# EAGLE board Memory Display (EAGLE 7.7.0)
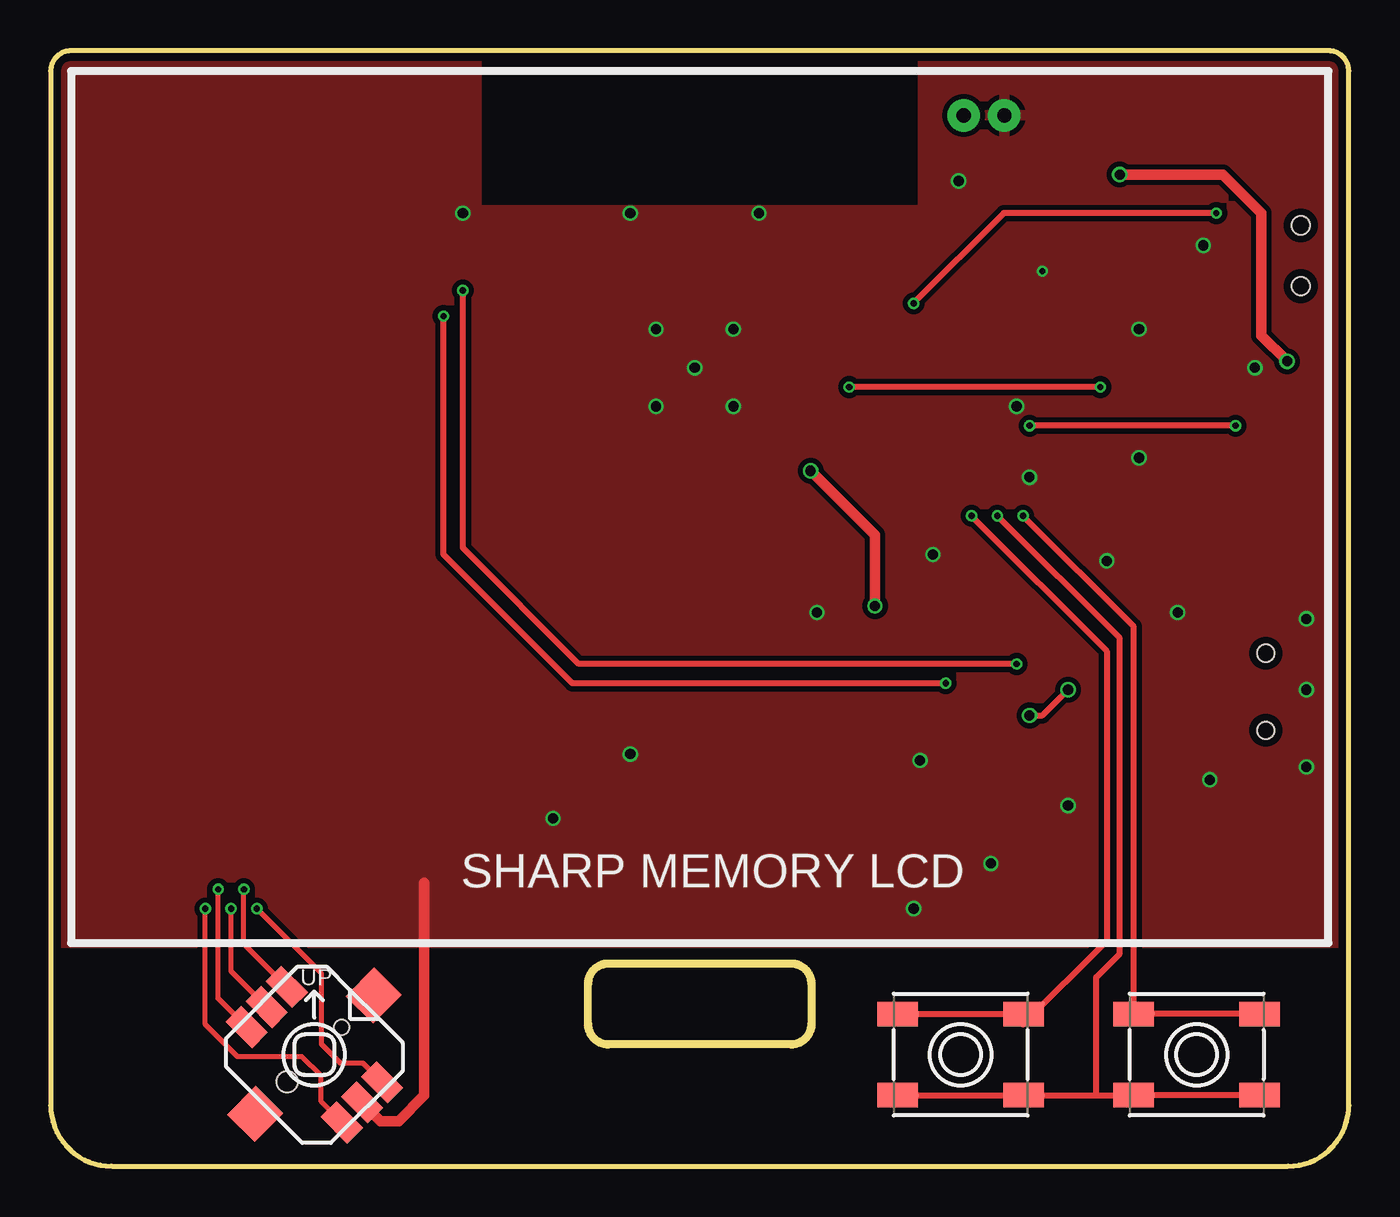
[diagram p0: board, top side]
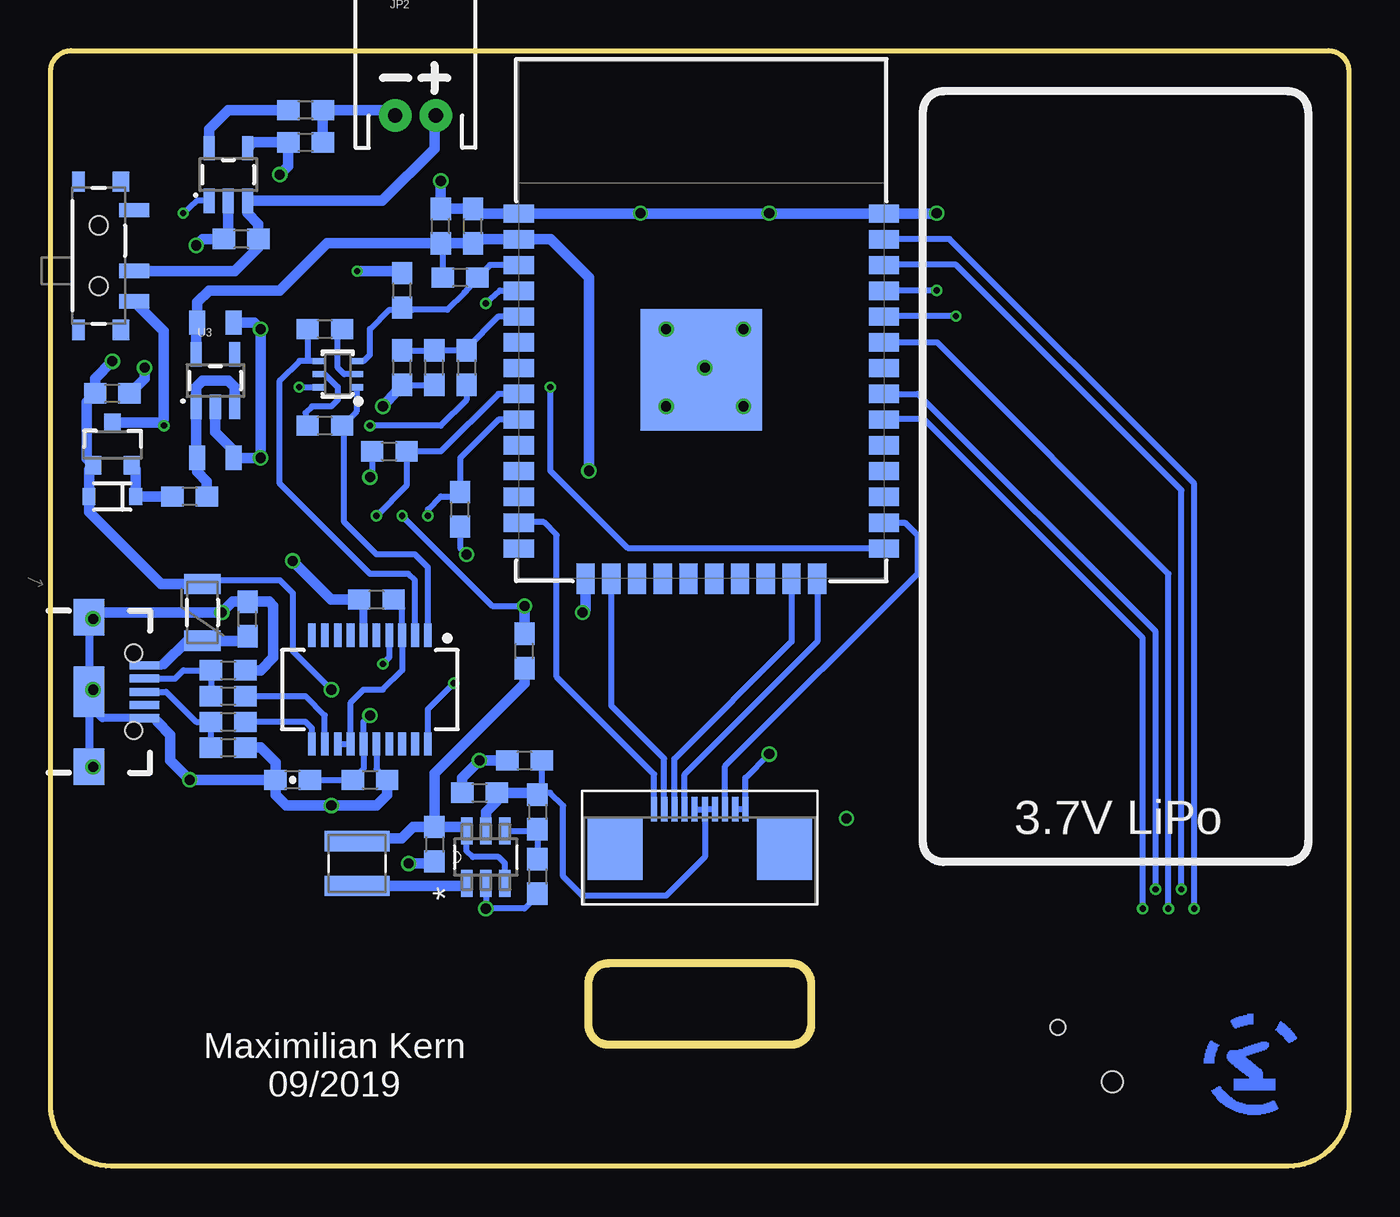
[diagram p1: board, bottom side, seen from below]

Size 64 x 55 mm. Coordinates in mm from the lower left corner, seen from the top.
Outline: 63,55 1,55 arc90 0,54 0,3 arc90 3,0 61,0 arc90 64,3 64,54 arc90 63,55
Copper layers (1*16): Top 0.035559375mm / dielectric 1.6mm / Bottom 0.035559375mm
Design rules "oshpark-2layer *": minimum track width 6mil, minimum drill 10mil, track to track 6mil, track to pad 6mil, pad to pad 6mil, via to via 6mil, smd to smd 6mil, copper to edge 15mil, drill to drill 6mil, minimum pad ring 5mil, minimum via ring 5mil, stop-mask expansion 2.5mil, vias tented up to drill 43mil, thermal gap 10mil
bKeepout: area 2,15 to 21,53
Milling: 8 lines

## Footprints (pad centres in the part's own frame; a part is rotated, then mirrored left to right if it is on the bottom)
0603 = smd 1.1 x 1: 1 -0.85,0; 2 0.85,0
0805 = smd 0.8 x 1.2: 1 -0.9,0; 2 0.9,0
0603-CAP = smd 1.1 x 1: 1 -0.85,0; 2 0.85,0
SOD-323 = smd 0.63 x 0.83: A 1.15,0; C -1.15,0
PTC-1206 = smd 1 x 1.8: 1 -1.4,0; 2 1.4,0
JST-2-PTH = drill 0.7 pad 1.6: 1 -1,0; 2 1,0
USB-B-MICRO-SMD_V03 = smd 1.45 x 0.4: D+ 2.725,0; D- 2.725,0.65; GND 2.725,-1.3; ID 2.725,-0.65; VBUS 2.725,1.3 | smd 1.5 x 1.8: SHIELD1 0,3.685; SHIELD2 0,-3.685 | smd 1.5 x 2.5: SHIELD3 0,0 | hole 0.85: 2.2,1.9; 2.2,-1.9
68711014522 = smd 0.3 x 1.2: 1 -2.25,0.6; 2 -1.75,0.6; 3 -1.25,0.6; 4 -0.75,0.6; 5 -0.25,0.6; 6 0.25,0.6; 7 0.75,0.6; 8 1.25,0.6; 9 1.75,0.6; 10 2.25,0.6 | smd 2.7 x 3: Z1 -4.18,-1.38; Z2 4.18,-1.38
WE-TPC_2811/2813_OLD = smd 1 x 3.2: 1 -1.1,0; 2 1.1,0
SOT23-3 = smd 0.8 x 0.9: 1 -0.95,-1; 2 0.95,-1; 3 0,1.1
SC70-6 = smd 0.3 x 0.66: 1 -0.65,-0.92; 2 0,-0.92; 3 0.65,-0.92; 4 0.65,0.92; 5 0,0.92; 6 -0.65,0.92
JOYSTICK_MINI = smd 1.85 x 1.1: A -3.325,1.4; B 3.325,1.4; C -3.325,-1.4; CTR -3.325,0; D 3.325,-1.4; GND 3.325,0 | smd 1.9 x 2: NC 0,4.13; NC@0 0,-4.13 | hole 0.75: 0,1.9 | hole 1.05: 0,-1.9
SWITCH-SPST-SMD-A = smd 0.7 x 1.5: 1 -2.25,-1.75; 2 -0.75,-1.75; 3 2.25,-1.75 | smd 1 x 0.6: GND1 -3.65,1; GND3 3.65,1 | smd 1 x 0.8: GND2 -3.65,-1.1; GND4 3.65,-1.1 | hole 0.9: -1.5,0; 1.5,0
EVQ-Q2_SMALLER = smd 2 x 1.2: A -3.1,-2; A' 3.1,-2; B -3.1,2; B' 3.1,2
SOT23-5 = smd 0.55 x 1.2: 1 -0.95,-1.3; 2 0,-1.3; 3 0.95,-1.3; 4 0.95,1.3; 5 -0.95,1.3
ESP-WROOM-32 = smd 0.9 x 1.5: 1 7.7,9; 2 6.43,9; 3 5.16,9; 4 3.89,9; 5 2.62,9; 6 1.35,9; 7 0.08,9; 8 -1.19,9; 9 -2.46,9; 10 -3.73,9; 11 -5,9; 12 -6.27,9; 13 -7.54,9; 14 -8.81,9; 25 -8.81,-9; 26 -7.54,-9; 27 -6.27,-9; 28 -5,-9; 29 -3.73,-9; 30 -2.46,-9; 31 -1.19,-9; 32 0.08,-9; 33 1.35,-9; 34 2.62,-9; 35 3.89,-9; 36 5.16,-9; 37 6.43,-9; 38 7.7,-9 | smd 1.5 x 0.9: 15 -10.3,5.715; 16 -10.3,4.445; 17 -10.3,3.175; 18 -10.3,1.905; 19 -10.3,0.635; 20 -10.3,-0.635; 21 -10.3,-1.905; 22 -10.3,-3.175; 23 -10.3,-4.445; 24 -10.3,-5.715 | smd 6 x 6: GND 0,0
SSOP20_L = smd 0.381 x 1.143: 1 -2.857,-2.68; 2 -2.223,-2.68; 3 -1.587,-2.68; 4 -0.953,-2.68; 5 -0.318,-2.68; 6 0.318,-2.68; 7 0.953,-2.68; 8 1.587,-2.68; 9 2.223,-2.68; 10 2.857,-2.68; 11 2.857,2.68; 12 2.223,2.68; 13 1.587,2.68; 14 0.953,2.68; 15 0.318,2.68; 16 -0.318,2.68; 17 -0.953,2.68; 18 -1.587,2.68; 19 -2.223,2.68; 20 -2.857,2.68
SOT95P270X145-6N = smd 1.321 x 0.559: 1 -1.295,0.94; 2 -1.295,0; 3 -1.295,-0.94; 4 1.295,-0.94; 5 1.295,0; 6 1.295,0.94

## Placement (x,y rotation side)
C1  4.7uF  [0603]  45.09,15.88 270 bottom
C2  0.1uF  [0603]  46.67,43.18 90 bottom
C3  0.1uF  [0603]  44.77,46.35 90 bottom
C4  0.1uF  [0603]  40.64,20 180 bottom
C5  10uF  [0603]  43.18,46.35 90 bottom
C6  4.7uF  [0603]  54.61,45.72 180 bottom
C7  1.0uF  [0805]  55.88,34.92 0 bottom
C8  10uF  [0603]  42.86,18.41 0 bottom
C9  0.1uF  [0603]  46.67,39.37 90 bottom
C10  2.2uF  [0805]  55.88,41.59 0 bottom
C11  0.1uF  [0603]  54.29,26.99 90 bottom
C12  47pF  [0603]  55.24,24.45 0 bottom
C13  47pF  [0603]  55.24,20.64 0 bottom
C14  0.1uF  [0603]  48.26,19.05 0 bottom
C15  4.7uF  [0603-CAP]  52.07,19.05 180 bottom
C16  0.1uF  [0603]  47.94,27.94 180 bottom
C19  4.7uF  [0603]  51.44,50.48 0 bottom
D3  BAT20J  [SOD-323]  60.96,33.02 180 bottom
F1  500mA  [PTC-1206]  56.52,27.3 90 bottom
JP2  LiPo  [JST-2-PTH]  46.02,51.81 0 bottom
JP15  [USB-B-MICRO-SMD_V03]  62.1,23.39 0 bottom
K1  68711014522  [68711014522]  32,17 0 bottom
L1  4.7µH  [WE-TPC_2811/2813_OLD]  48.9,14.92 270 bottom
Q1  2.5A/30V  [SOT23-3]  60.96,35.56 0 bottom
Q2  MBT3904DW1T1  [SC70-6]  49.85,39.05 90 bottom
R1  0  [0603]  57.15,33.02 180 bottom
R2  10k  [0603]  43.81,32.38 90 bottom
R3  0  [0603]  40.64,25.4 90 bottom
R4  10k  [0603]  47.31,35.24 0 bottom
R5  976k  [0603]  40.01,17.46 270 bottom
R6  3.9k  [0603]  51.44,52.07 180 bottom
R7  10k  [0603]  60.96,38.1 180 bottom
R8  10k  [0603]  43.81,43.81 180 bottom
R9  309k  [0603]  40.01,14.29 270 bottom
R10  470k  [0603]  43.5,39.37 270 bottom
R11  470k  [0603]  45.09,39.37 90 bottom
R13  27  [0603]  55.24,23.18 0 bottom
R14  27  [0603]  55.24,21.91 0 bottom
R17  10k  [0603]  50.48,36.51 180 bottom
R18  10k  [0603]  50.48,41.27 0 bottom
S1  5-WAY-TACTILE-SWITCH  [JOYSTICK_MINI]  13,5.5 315 top
S2  [SWITCH-SPST-SMD-A]  61.63,44.89 90 bottom
SW1  EVQQ  [EVQ-Q2_SMALLER]  44.87,5.5 0 top
SW2  EVQQ  [EVQ-Q2_SMALLER]  56.5,5.5 0 top
U1  MCP73831  [SOT23-5]  55.24,48.9 0 bottom
U2  ESP-WROOM-32  [ESP-WROOM-32]  31.92,39.27 90 bottom
U3  AP2112K-3.3V  [SOT23-5]  55.88,38.73 0 bottom
U4  FT231XS  [SSOP20_L]  48.26,23.5 180 bottom
U$1  MCP1640CT-I/CHY  [SOT95P270X145-6N]  42.55,15.24 90 bottom

## Library data of the parts
C1 C8 C12 C13 = SparkFun-Capacitors; PROD_ID: CAP-08913
C2-C4 C9 C11 C14 C16 = SparkFun-Capacitors; PROD_ID: CAP-00810
C5 = SparkFun-Capacitors; PROD_ID: CAP-11015
C6 C15 C19 = SparkFun-Capacitors; PROD_ID: CAP-08280
C7 C10 = SparkFun-Capacitors; PROD_ID: CAP-11625
D3 = SparkFun-DiscreteSemi; PROD_ID: DIO-11623
F1 = SparkFun-PowerIC; PROD_ID: RES-11150
JP2 = SparkFun-Connectors; PROD_ID: CONN-09863; SKU: PRT-09914
JP15 = SparkFun-Connectors; PROD_ID: CONN-11752
K1 = Eagle_FPC_CONNECTOR_AND_FFC_CAB_rev15c
L1 = EMCComponents (rev19e); WE-NUMBER: 744029004/4,7uH
Q1 = SparkFun-DiscreteSemi; PROD_ID: TRANS-11308
Q2 = esp32-thing-temp; PROD_ID: TRANS-13337
R1-R5 R7-R11 R17 R18 = SparkFun-Resistors; PROD_ID: RES-00824
R6 = SparkFun-Resistors; PROD_ID: RES-08296
R13 R14 = SparkFun-Resistors; PROD_ID: RES-09334
S1 = SparkFun-Electromechanical
S2 = SparkFun-Electromechanical; PROD_ID: SWCH-10651
SW1 SW2 = microbuilder
U1 = SparkFun-PowerIC; PROD_ID: IC-09995
U2 = SparkFun-RF; PROD_ID: IC-13849
U3 = SparkFun-PowerIC; PROD_ID: VREG-12457
U4 = SparkFun-DigitalIC; PROD_ID: IC-11524
U$1 = Microchip_By_element14_Batch_1; MPN: MCP1640CT-I/CHY; OC_FARNELL: 1800208; OC_NEWARK: 73R3626; PACKAGE: SOT-6; SUPPLIER: Microchip

## Nets
3.3V: C3.1 C5.1 C10.1 R3.2 R8.2 SW1.A SW1.A' SW2.A SW2.A' U2.2 U3.5
3.3V_F: C16.1 U4.3 U4.13 U4.14
5V: C4.1 C8.2 K1.5 K1.6 K1.7 R5.1 U$1.5
ADC_BAT: C9.2 R10.1 R11.2 U2.5
B_VFB: R5.2 R9.1 U$1.4
CRG_STAT: U1.1 U2.4
D+: C13.1 JP15.D+ R14.1
D-: C12.1 JP15.D- R13.1
DTR: Q2.1 R17.1 U4.1
GND: C1.2 C2.2 C3.2 C4.2 C5.2 C6.2 C7.2 C8.1 C9.1 C10.2 C11.2 C12.2 C13.2 C14.2 C15.2 C16.2 C19.2 JP2.1 JP15.GND JP15.SHIELD1 JP15.SHIELD2 JP15.SHIELD3 K1.9 K1.10 R2.1 R4.1 R6.1 R7.1 R9.2 R11.1 S1.GND U1.2 U2.1 U2.15 U2.38 U2.GND U3.2 U4.6 U4.16 U$1.2
IO0: Q2.6 U2.25
N$1: C1.1 L1.1 R3.1 U$1.3 U$1.6
N$2: L1.2 U$1.1
N$3: C7.1 R1.1 U3.1 U3.3
N$4: Q1.3 R10.2 S2.1
N$5: D3.C Q1.2 R1.2
N$7: R13.2 U4.12
N$8: R14.2 U4.11
N$10: Q2.5 R17.2
N$12: Q2.2 R18.2
N$16: R6.2 U1.5
PBT_A: R2.2 SW1.B SW1.B' U2.9
PBT_B: R4.2 SW2.B SW2.B' U2.8
PBT_CENT: S1.CTR U2.33
PBT_DOWN: S1.D U2.37
PBT_LEFT: S1.C U2.36
PBT_RIGHT: S1.B U2.30
PBT_UP: S1.A U2.31
RESET: C2.1 Q2.3 R8.1 U2.3
RTS: Q2.4 R18.1 U4.2
RXD: U2.34 U4.20
SHARP_CS: K1.3 U2.23
SHARP_EXTMODE: K1.8 U2.26
SHARP_MOSI: K1.2 U2.16
SHARP_SCK: K1.1 U2.13
SHARP_VCOM: K1.4 U2.24
TXD: U2.35 U4.4
V_BATT: C6.1 JP2.2 S2.2 U1.3
V_USB: C14.1 C15.1 C19.1 D3.A F1.2 Q1.1 R7.2 U1.4 U4.15
VUSB-RAW: C11.1 F1.1 JP15.VBUS

## Tracks (layer width: path | path; a pad name or v marks a point on that pad's centre or on a via)
3.3V  (via drill 0.3, 0.5)
  Top 0.305: SW1.A SW1.A' 51.55,3.5 | 51.55,3.5 SW2.A SW2.A' | 51.55,3.5 51.55,9.32 52.7,10.48 52.7,26.04 v46.67,32.07
  Top 0.508: v40.64,27.62 40.64,31.11 v37.47,34.29
  Bottom 0.305: R8.2 44.66,45.29 C3.1 | v46.67,32.07 42.23,27.62 v40.64,27.62
  Bottom 0.508: v40.64,27.62 R3.2 | U3.5 56.83,41.54 C10.1 56.78,42.6 56.2,43.18 52.7,43.18 50.38,45.51 C3.1 C5.1 42.98,45.7 U2.2 39.35,45.7 37.47,43.81 v37.47,34.29
3.3V_F
  Bottom 0.305: U4.13 U4.14 49.21,22.86 48.58,23.5 47.62,23.5 46.67,24.45 U4.3 46.67,27.52 C16.1
5V
  Bottom 0.305: K1.7 K1.6 | K1.5 K1.6 | K1.6 31.75,15.24 33.66,13.34 37.78,13.34 38.73,14.29 38.73,17.78 39.37,18.41 39.9,18.41 R5.1 39.79,18.53 C4.1 | C8.2 41.7,18.31
  Bottom 0.508: R5.1 40.11,18.41 C8.2 42.01,18 42.55,17.46 U$1.5
ADC_BAT
  Bottom 0.305: C9.2 R11.2 R10.1 43.5,40.32 41.91,41.91 40.94,41.91 U2.5
B_VFB
  Bottom 0.305: R9.1 R5.2 40.08,16.54 U$1.4
CRG_STAT  (via drill 0.3)
  Top 0.305: v57.47,46.99 46.99,46.99 v42.55,42.55
  Bottom 0.305: U1.1 56.8,47.59 v57.47,46.99 | v42.55,42.55 41.85,43.18 U2.4
D+
  Bottom 0.305: C13.1 R14.1 56.83,21.91 58.31,23.39 JP15.D+
D-
  Bottom 0.305: R13.1 C12.1 57.47,24.45 57.88,24.04 JP15.D-
DTR
  Bottom 0.305: U4.1 45.4,29.53 46.04,30.16 47.94,30.16 49.53,31.75 49.53,36.41 R17.1 48.93,37.22 Q2.1
GND  (via drill 0.3, 0.5)
  Top 0.508: S1.GND 16.28,2.22 17.14,2.22 18.41,3.49 18.41,13.97
  Bottom 0.254: U2.GND 31.82,39.37 v31.75,39.37 | v61.91,19.68 61.93,19.7 JP15.SHIELD2
  Bottom 0.305: K1.9 K1.10 29.75,19.14 v28.57,20.32 | U4.16 47.94,19.58 C14.2 | C13.2 54.4,20.52 | JP15.GND 58.92,22.09 58.74,21.91 | C9.1 R11.1 | U$1.2 v42.55,12.7 40.64,12.7 40.01,13.34 R9.2 | R4.1 48.16,34.08 v48.26,33.97 | R2.1 43.81,30.48 v43.5,30.16
  Bottom 0.406: JP15.GND 61.46,22.09 62.23,22.86 62.23,23.27 JP15.SHIELD3 | JP15.SHIELD1 JP15.SHIELD3 | JP15.SHIELD3 JP15.SHIELD2 | U4.6 48.58,27.73 C16.2
  Bottom 0.508: C3.2 C5.2 42.95,46.97 U2.1 U2.38 20.34,46.97 v20.32,46.99 | C19.2 R6.1 47.27,52.07 JP2.1 | R7.1 59.37,38.84 v59.37,39.37 | U2.15 37.63,27.45 v37.78,27.3 | 58.74,21.91 58.1,21.27 58.1,20 v57.15,19.05 C15.2 | C15.2 52.92,19.9 53.66,20.64 C13.2 | v61.91,26.99 61.59,27.3 v55.56,27.3 55.03,27.84 C11.2 53.24,27.84 53.02,27.62 53.02,25.08 53.66,24.45 C12.2 | C16.2 50.16,27.94 v52.07,29.84 | v56.83,45.4 56.52,45.72 C6.2 55.24,45.94 U1.2 | C15.2 52.92,18.31 52.39,17.78 v50.16,17.78 47.94,17.78 47.41,18.31 C14.2 | C10.2 53.98,41.59 v53.66,41.27 v53.66,34.92 C7.2 54.98,35.3 55.88,36.2 U3.2 | C8.1 43.71,19.15 v42.86,20 C4.2 | v48.9,44.13 46.77,44.13 C2.2 | C9.1 v47.62,37.47 | v44.77,48.58 44.77,46.99 | v46.35,14.92 45.19,14.92 C1.2
  other vias: 29.84,41.27 24.77,17.14 61.91,23.5 29.84,37.47 33.66,37.47 33.66,41.27 28.57,46.99 34.92,46.99
  pour Top (isolate 0.254): -1,56 21,56 21,47.13 43,47.13 43,56 65,56 65,11 -1,11
IO0  (via drill 0.3)
  Top 0.305: v51.75,38.42 v39.37,38.42
  Bottom 0.305: v51.75,38.42 50.78,38.42 Q2.6 | U2.25 22.92,30.48 35.56,30.48 39.37,34.29 v39.37,38.42
N$1
  Bottom 0.305: L1.1 48.33,16.16 47.62,16.34 47.8,16.34 | U$1.3 41.6,14.94 41.91,15.24 43.18,15.24 43.5,15.56 43.5,16.52 U$1.6
  Bottom 0.508: C1.1 45.09,19.37 40.64,23.81 R3.1 | C1.1 43.67,16.73 U$1.6 | 48.33,16.16 46.7,16.16 46.14,16.73 C1.1
N$2
  Bottom 0.305: 43.68,13.82 U$1.1
  Bottom 0.508: 43.68,13.82 L1.2
N$3
  Bottom 0.508: R1.1 56.3,33.76 56.78,34.24 C7.1 56.83,35.29 U3.1 56.83,38.42 56.52,38.73 55.24,38.73 54.93,38.42 U3.3
N$4  (via drill 0.3)
  Top 0.305: v58.42,36.51 v48.26,36.51
  Bottom 0.305: 58.59,36.66 58.42,36.83 v58.42,36.51 | v48.26,36.51 44.77,36.51 43.5,37.78 R10.2
  Bottom 0.508: 58.42,36.83 58.42,41.17 S2.1 | Q1.3 58.59,36.66
N$5
  Bottom 0.508: Q1.2 59.81,34.36 D3.C R1.2
N$7
  Bottom 0.305: U4.12 50.48,22.23 51.44,23.18 R13.2
N$8
  Bottom 0.305: U4.11 51.12,21.59 51.44,21.91 R14.2
N$10
  Bottom 0.305: Q2.5 50.48,39.05 49.85,38.42 49.85,37.78 50.16,37.47 51.12,37.47 51.44,37.15 51.44,36.62 R17.2
N$12
  Bottom 0.305: Q2.2 49.53,39.05 49.85,39.37 49.85,41.06 R18.2
N$16
  Bottom 0.508: R6.2 55.24,52.07 56.2,51.12 U1.5
PBT_A  (via drill 0.3)
  Top 0.305: SW1.B SW1.B' 47.94,7.52 47.94,6.99 52.07,11.11 52.07,25.4 v45.4,32.07
  Bottom 0.305: U2.9 41.93,36.81 43.81,34.92 R2.2 44.03,33.02 44.77,33.02 45.4,32.38 v45.4,32.07
PBT_B  (via drill 0.3)
  Top 0.305: SW2.B' SW2.B 53.4,26.61 v47.94,32.07
  Bottom 0.305: U2.8 41.93,38.08 44.77,35.24 R4.2 46.46,33.55 v47.94,32.07
PBT_CENT  (via drill 0.3)
  Top 0.254: S1.CTR 8.89,9.61 v8.89,12.7
  Bottom 0.305: v8.89,12.7 8.89,29.21 20.3,40.62 U2.33
PBT_DOWN  (via drill 0.3)
  Top 0.254: v7.62,12.7 7.62,6.99 9.21,5.4 12.38,5.4 13.34,4.45 13.34,3.19 S1.D
  Bottom 0.305: v7.62,12.7 7.62,33.66 19.68,45.72 22.9,45.72 U2.37
PBT_LEFT  (via drill 0.3)
  Top 0.254: S1.C 8.26,8.27 v8.26,13.65
  Bottom 0.305: v8.26,13.65 8.26,33.34 19.37,44.45 22.9,44.45 U2.36
PBT_RIGHT  (via drill 0.3)
  Top 0.254: v10.16,12.7 13.34,9.53 13.34,6.03 14.29,5.08 15.4,5.08 S1.B
  Bottom 0.305: v10.16,12.7 10.16,26.04 20.95,36.83 22.92,36.83 U2.30
PBT_UP  (via drill 0.3)
  Top 0.254: S1.A 9.53,10.96 v9.53,13.65
  Bottom 0.305: v9.53,13.65 9.53,26.35 21.25,38.08 U2.31
RESET
  Bottom 0.305: U2.3 42.35,44.43 R8.1 43.6,43.08 44.45,42.23 46.14,42.23 C2.1 46.77,42.23 47.31,42.23 48.26,41.27 48.26,40.01 48.56,39.7 Q2.3
RTS
  Bottom 0.305: U4.2 46.04,28.89 46.35,29.21 48.26,29.21 52.7,33.66 52.7,38.73 51.74,39.7 51.44,39.7 | Q2.4 51.44,39.7 | R18.1 51.33,39.8 51.44,39.7
RXD  (via drill 0.3)
  Top 0.305: v44.13,23.81 25.72,23.81 19.37,30.16 v19.37,41.91
  Bottom 0.305: U4.20 45.4,22.54 v44.13,23.81 | v19.37,41.91 22.9,41.91 U2.34
SHARP_CS
  Bottom 0.305: K1.3 33.25,20.09 27.48,25.86 U2.23
SHARP_EXTMODE
  Bottom 0.305: K1.8 30.75,19.73 21.27,29.21 21.27,31.11 21.89,31.73 U2.26
SHARP_MOSI
  Bottom 0.305: U2.16 36.37,22.71 33.75,20.1 K1.2
SHARP_SCK
  Bottom 0.305: K1.1 34.25,19.33 39.05,24.13 39.05,31.11 39.69,31.75 40.9,31.75 U2.13
SHARP_VCOM
  Bottom 0.305: U2.24 26.2,25.86 32.75,19.32 K1.4
TXD  (via drill 0.3)
  Top 0.305: v47.62,24.77 26.04,24.77 20.32,30.48 v20.32,43.18
  Bottom 0.305: U4.4 47.31,25.08 v47.62,24.77 | v20.32,43.18 22.9,43.18 U2.35
V_BATT
  Bottom 0.508: S2.2 54.92,44.14 53.76,45.3 C6.1 53.76,46.46 54.3,46.99 U1.3 47.66,47.59 45.09,50.16 45.09,51.74 JP2.2
V_USB  (via drill 0.5)
  Top 0.305: v48.26,22.23 48.9,22.23 v50.16,23.5
  Top 0.508: v52.7,48.9 57.78,48.9 59.69,46.99 59.69,40.96 v60.96,39.69
  Bottom 0.305: C15.1 C14.1 48.58,19.58 U4.15 48.58,21.91 v48.26,22.23 | 56.65,28.7 56.52,28.89 52.7,28.89 52.07,28.26 52.07,25.4 v50.16,23.5
  Bottom 0.508: U1.4 54.01,50.48 C19.1 52.28,49.31 v52.7,48.9 | F1.2 56.65,28.7 58.55,28.7 62.11,32.27 D3.A 62.11,34.36 Q1.1 62.23,34.88 62.23,37.68 R7.2 61.81,38.84 v60.96,39.69
VUSB-RAW
  Bottom 0.406: JP15.VBUS 58.49,24.69 58.42,24.77
  Bottom 0.508: 58.42,24.77 57.28,25.91 F1.1 54.52,25.91 C11.1
(copper drawn outside any net)
  shapes: Bottom area x136

## Text on the board
tNames: SHARP MEMORY LCD
bNames: 3.7V LiPo | Maximilian Kern / 09/2019